# Altium PCB altium.pcbdoc
Units mil, origin at the board's own origin, x right, y up, seen from the top; angles counter-clockwise.
Board outline 9340 x 5450 mil, 2 copper layers (Top Layer, Bottom Layer); 25 components, 42 nets, 121 pads, 14 vias.
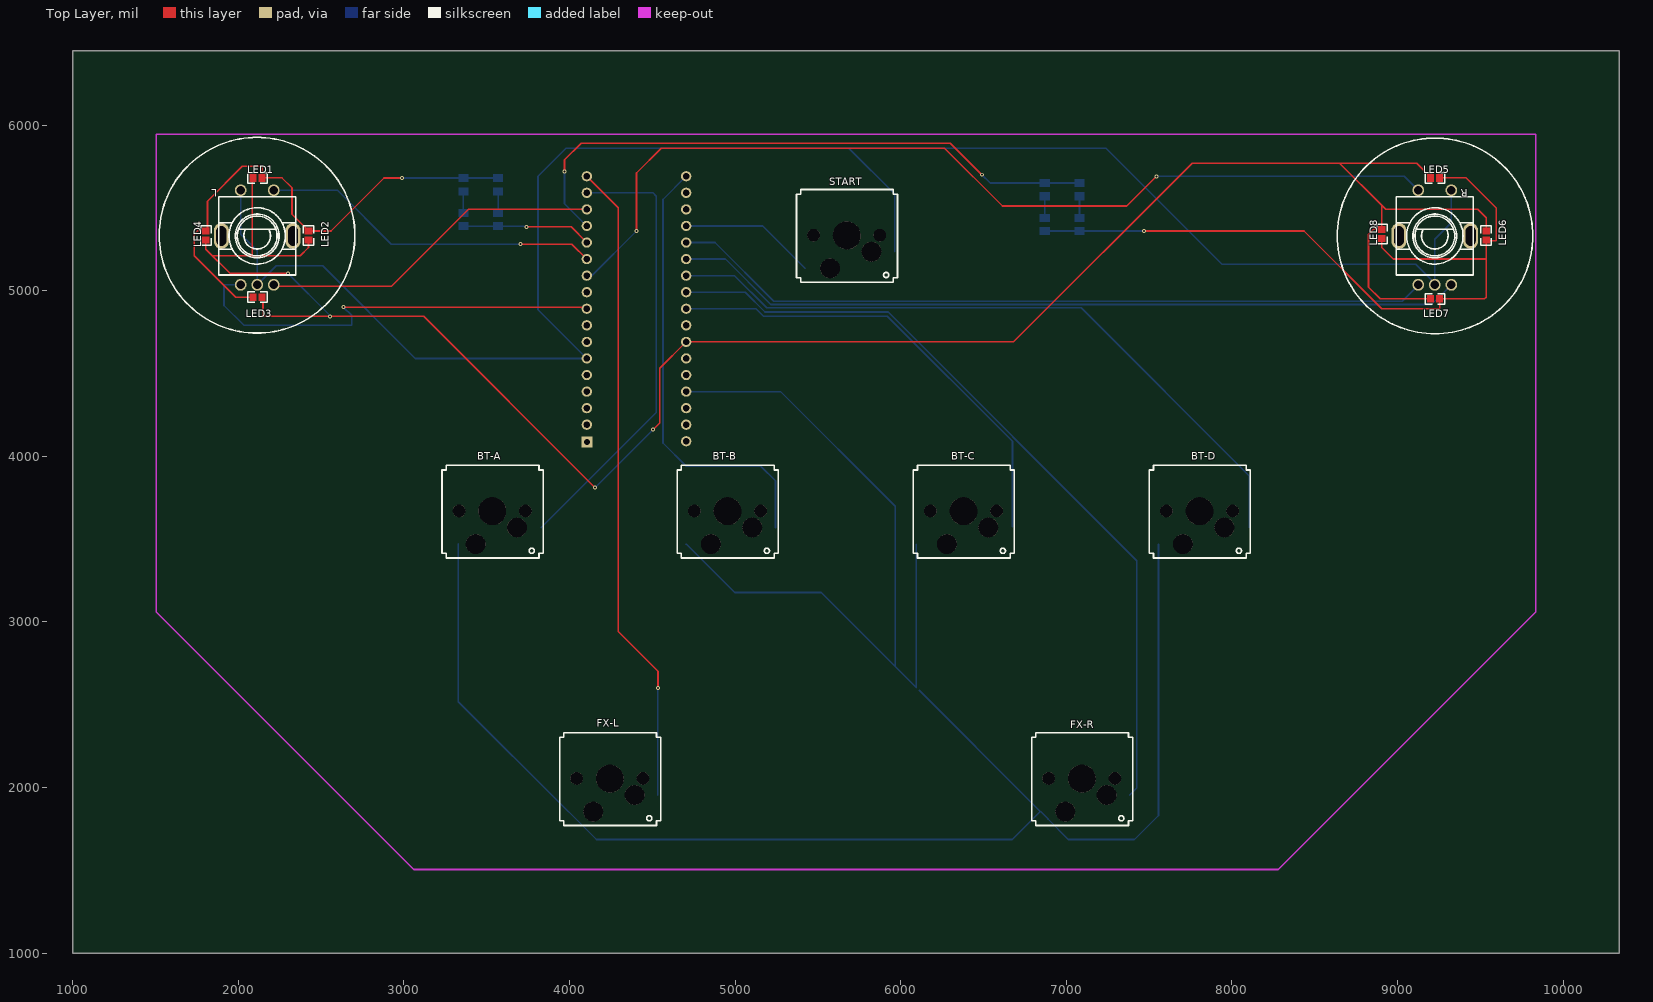
[diagram p0: Top Layer view]
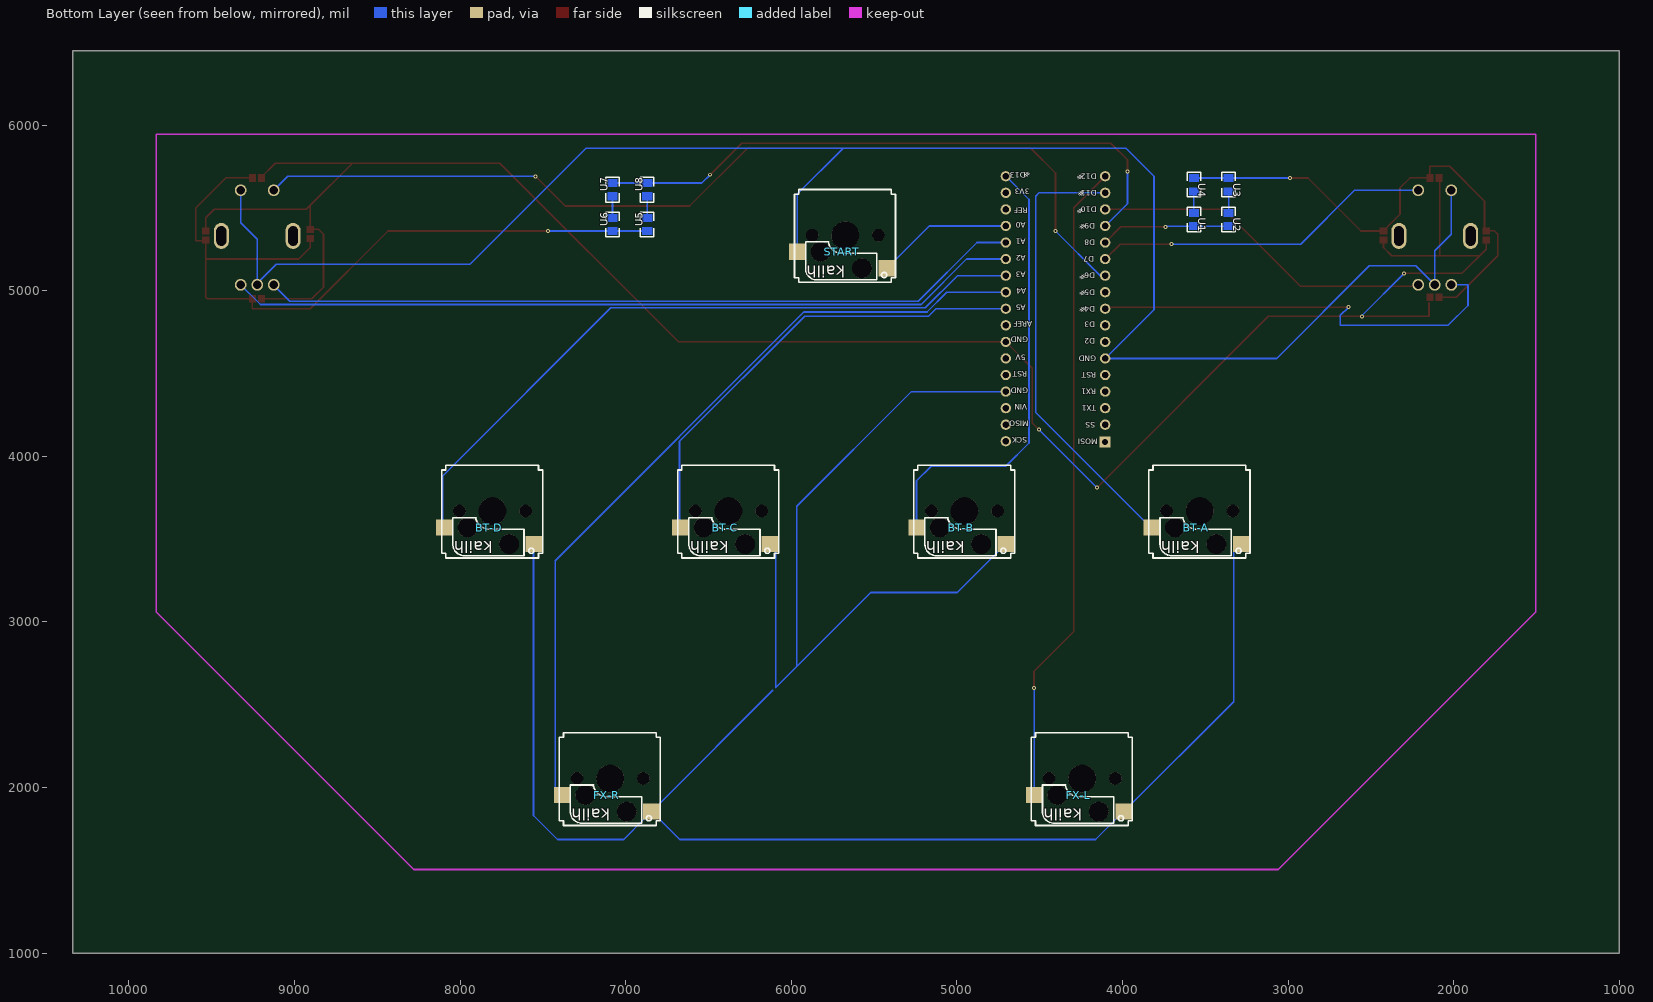
[diagram p1: Bottom Layer view, seen from below]

## Layer stack, top to bottom
Top Layer: signal copper (thickness not stored)
Dielectric: dielectric 12.6, FR-4, Dk 4.8
Bottom Layer: signal copper (thickness not stored)

## Board outline
10340,1000 1000,1000 1000,6450 10340,6450

## Components (designator, comment, footprint, x,y, rotation, side; value= is the part's Value field where it differs from the comment)
BT-A "凯华KAILH热插拔底座" ? 3533.95,3670 r0 top
BT-B "凯华KAILH热插拔底座" ? 4953.95,3670 r0 top
BT-C "凯华KAILH热插拔底座" ? 6378.95,3670 r0 top
BT-D "凯华KAILH热插拔底座" ? 7803.95,3670 r0 top
FX-L "凯华KAILH热插拔底座" ? 4243.95,2055 r0 top
FX-R "凯华KAILH热插拔底座" ? 7093.95,2055 r0 top
L "SW-DIP-11.7X12" SW-DIP-11.7X12 2115,5320.79 r0 top
LED1 "0603" 0603 2085,5680.79 r0 top
LED2 "0603" 0603 2425,5300.79 r90 top
LED3 "0603" 0603 2085,4960.79 r0 top
LED4 "0603" 0603 1805,5300.79 r90 top
LED5 "0603" 0603 9195,5680.79 r0 top
LED6 "0603" 0603 9535,5300.79 r90 top
LED7 "0603" 0603 9195,4950.79 r0 top
LED8 "0603" 0603 8905,5310.79 r90 top
R "SW-DIP-11.7X12" SW-DIP-11.7X12 9225,5320.79 r0 top
START "凯华KAILH热插拔底座" ? 5673.95,5335 r0 top
U1 "0805" 0805 3570,5470 r90 bottom
U2 "0805" 0805 3360,5470 r90 bottom
U3 "0805" 0805 3360,5680 r90 bottom
U4 "0805" 0805 3570,5680 r90 bottom
U5 "0805" 0805 6870,5360 r270 bottom
U6 "0805" 0805 7080,5360 r270 bottom
U7 "0805" 0805 7080,5570 r270 bottom
U8 "0805" 0805 6870,5570 r270 bottom

## Footprints (in the part's own frame and the unit in brackets; to place one, negate y for a bottom-side part, rotate by r counter-clockwise, add the part's x,y. Pads: shape width x height; smd on the part's side, far side on the other; paste and mask are expansions set on the pad)
0603 [mil]
  Top Layer region: 23.63,-21.65 -15.74,-21.65 -15.74,21.65 23.63,21.65
  Top Layer region: 78.75,-21.65 39.38,-21.65 39.38,21.65 78.75,21.65
  silkscreen extent -28,-32 91,32
0805 [mil]
  round 0 smd: 1(-0.01,0.01) 2(-80.01,0.01)
  Top Layer region: -22.85,28.94 -22.85,-28.93 22.82,-28.93 22.82,28.94
  Top Layer region: -102.85,28.94 -102.85,-28.93 -57.18,-28.93 -57.18,28.94
  silkscreen extent -114,-41 35,41
SW-DIP-11.7X12 [mm]
  oval 2.3x4 hole 1.5 slot 3 at 90 deg copper offset 0,0: 6(5.5,0.25) 7(-5.5,0.25)
  round 1.8 hole 1.3: A(-2.54,-7.25) B(2.54,-7.25) C(0,-7.25) D(-2.54,7.25) E(2.54,7.25)
  silkscreen extent -5.9,-5.75 5.9,6.25
? [mil]
  rect 100.4x98.4 smd far side: 1(-250,-200) 2(290,-100)
  round 75 hole 75 slot 75.2 at 0 deg unplated: ""(-200,0) ""(200,0)
  round 118.11 hole 118.11 slot 118.31 at 0 deg unplated: ""(-100,-200) ""(150,-100)
  round 165 hole 165 slot 165.2 at 0 deg unplated: ""(0,0)
  round 161.42 hole 161.42 slot 161.62 at 0 deg unplated: ""(2.22,-4.21)
  silkscreen extent -303,-284 307,276

## Free pads (board coordinates)
  rect 65x65 hole 35.43: 1(4105.83,4086.34)
  round 62 hole 36 slot 36.2 at 90 deg: 2(4105,4190.79) 3(4105,4290.79) 4(4105,4390.79) 5(4105,4490.79) 6(4105,4590.79) 7(4105,4690.79) 8(4105,4790.79) 9(4105,4890.79) 10(4105,4990.79) 11(4105,5090.79) 12(4105,5190.79) 13(4105,5290.79) 14(4105,5390.79) 15(4105,5490.79) 16(4105,5590.79) 17(4105,5690.79) 18(4705,5690.79) 19(4705,5590.79) 20(4705,5490.79) 21(4705,5390.79) 22(4705,5290.79) 23(4705,5190.79) 24(4705,5090.79) 25(4705,4990.79) 26(4705,4890.79) 27(4705,4790.79) 28(4705,4690.79) 29(4705,4590.79) 30(4705,4490.79) 31(4705,4390.79) 32(4705,4290.79) 33(4705,4190.79) 34(4705,4090.79)
  round 165 hole 165 slot 165.2 at 0 deg unplated: ""(5673.95,5335)

## Via types
v1: diameter 24, hole 12, Top Layer to Bottom Layer, 14 vias

## Nets (pads, with @x,y where several pads share a name; then routed paths per layer and width w, separated by ;. In a path a pad name is that pad's centre, name@x,y a point inside that pad or via, vN(x,y) a via of type N, cw(c..) or ccw(c..) an arc to the next point about the centre after c; other vN are vias at no path point)
0L1: U2.1 U3.2 | length 130
  Bottom Layer w10: U2.1 U3.2
0L2: U1.1 U4.2 | length 130
  Bottom Layer w10: U1.1 U4.2
0R1: U6.2 U7.1 | length 130
  Bottom Layer w10: U6.2 U7.1
0R2: U5.2 U8.1 | length 130
  Bottom Layer w10: U5.2 U8.1
3V3: pad.19
+5V: pad.29
A0: pad.21 START.1 | length 825.7
  Bottom Layer w10: pad.21@4704.17,5390.79 5167.16,5390.79 5422.95,5135 START.1
A1: pad.22 R.A | length 4617
  Bottom Layer w10: pad.22@4704.17,5290.79 4879.54,5290.79 5233.95,4936.38 9028.28,4936.38 R.A@9131.6,5039.7
A2: pad.23 R.B | length 4789
  Bottom Layer w10: pad.23@4704.17,5190.79 4941.97,5190.79 5216.38,4916.38 9205.08,4916.38 R.B@9328.4,5039.7
A3: BT-D.2 pad.24 | length 4212.8
  Bottom Layer w10: pad.24@4704.17,5090.79 4996.97,5090.79 5191.38,4896.38 7089.41,4896.38 8105,3880.79 BT-D.2@8105,3570
A4: FX-R.2 pad.25 | length 4825.8
  Bottom Layer w10: pad.25@4704.17,4990.79 5061.97,4990.79 5181.38,4871.38 5924.41,4871.38 7426.38,3369.41 7426.38,1997.43 FX-R.2
A5: BT-C.2 pad.26 | length 2816.9
  Bottom Layer w10: pad.26@4704.17,4890.79 5126.97,4890.79 5171.38,4846.38 5919.41,4846.38 6675,4090.79 BT-C.2@6675,3576.05
AREF: pad.20
D0/RX: pad.4
D1/TX: pad.3
D2/SDA: pad.7
D3/SCL: pad.8
D4*: L.A pad.9 | length 2639.7
  Top Layer w10: v1(2635,4900.79) pad.9@4099.72,4900.79
  Bottom Layer w10: L.A 1915,5035.35 1915,4910.79 2035,4790.79 2685,4790.79 2685,4850.79 v1(2635,4900.79)
D5*: pad.10
D6*: pad.11 R.D | length 5799.4
  Top Layer w10: v1(4405,5360.79) 4405,5710.79 4555,5860.79 6265,5860.79 6615,5510.79 7365,5510.79 v1(7545,5690.79)
  Bottom Layer w10: pad.11@4104.17,5090.79 4135,5090.79 v1(4405,5360.79) ; v1(7545,5690.79) 9040.43,5690.79 R.D
D7: L.E pad.12 | length 2062.1
  Top Layer w10: v1(3705,5280.79) 4015,5280.79 pad.12
  Bottom Layer w10: L.E 2599.57,5606.23 2925,5280.79 v1(3705,5280.79)
GND: BT-A.1 BT-B.1 BT-C.1 BT-D.1 FX-L.1 FX-R.1 L.C L.D pad.6 pad.28 pad.31 R.C R.E START.2 | length 37553.1
  Top Layer w10: 1805,5300.79 1805,5250.79 1950.79,5105 v1(2300,5105) ; 1845,5210.79 2085,5210.79 ; 2085,5680.79 2085,5210.79 ; 2150,4925.79 2150,4845 v1(2555,4845) 3120.79,4845 v1(4155,3810.79) ; 2425,5300.79 2425,5260.79 2375,5210.79 2085,5210.79 ; v1(4505,4160.79) 4545,4200.79 4545,4530.79 pad.28@4704.17,4689.96 ; pad.28@4709.41,4690.79 6680.79,4690.79 7760,5770 8650,5770 ; 8905,5370 8905,5515 ; 8905,5370.79 8855,5370.79 8825,5340.79 8825,5020.79 8895,4950.79 9195,4950.79 ; 9205,5680.79 9115.79,5770 8650,5770 ; 9535,5360.79 9535,5440.79 9485,5490.79 8929.21,5490.79 8905,5515 ; 8650,5770 8905,5515
  Bottom Layer w10: L.D 2014.99,5340.79 2115,5240.79 L.C ; L.C@2115,5035.49 2229.51,5150 2510,5150 3069.21,4590.79 pad.6 3810,4885.79 3810,5690 3980,5860 7240,5860 7940,5160 9109.7,5160 R.C@9230,5039.7 ; v1(2300,5105) 2555,4850 v1(2555,4845) ; BT-A.1@3329.15,3471.29 3329.15,2518.8 3992.95,1855 FX-L.1 ; FX-L.1@3994.95,1855 4163.57,1686.38 6674.33,1686.38 FX-R.1@6842.95,1855 ; v1(4155,3810.79) v1(4505,4160.79) ; BT-B.1 4704.95,3470 4997.38,3177.57 5521.38,3177.57 6095,2603.95 BT-C.1@6095,3470 ; pad.31@4704.17,4390.79 5274.54,4390.79 5967.66,3697.66 5967.66,2731.28 ; 5687.46,5860 5963.95,5583.51 START.2 ; 6111.38,2587.57 6798.75,1900.2 6798.75,1899.2 FX-R.1@6842.95,1855 ; BT-D.1@7556.38,3467.57 7556.38,1831.38 7411.38,1686.38 7012.57,1686.38 6889.15,1809.8 6889.15,1810.8 6844.95,1855 FX-R.1@6842.95,1855 ; R.C 9225,5310.79 9325,5410.79 R.E
IO8: pad.13 U1.2 U2.2 | length 786.1
  Top Layer w10: v1(3740,5385.24) 4010.55,5385.24 pad.13
  Bottom Layer w10: U2.2 U1.2 3735.25,5389.99 v1(3740,5385.24)
IO9*: pad.14 U7.2 U8.2 | length 3706.6
  Top Layer w10: v1(3970,5720) 3970,5790 4070.79,5890.79 6299.21,5890.79 v1(6490,5700)
  Bottom Layer w10: v1(3970,5720) 3970,5525.79 pad.14 ; v1(6490,5700) 6539.99,5650.01 U8.2 U7.2
IO10*: L.B pad.15 | length 2086.9
  Top Layer w10: L.B@2213.4,5035.49 2222.51,5026.38 2926.38,5026.38 3390.79,5490.79 pad.15@4104.17,5490.79
IO11*: BT-A.2 pad.16 | length 2717.8
  Bottom Layer w10: BT-A.2@3830,3570 4525,4265 4525,5570.79 4505,5590.79 pad.16@4104.17,5590.79
IO12*: FX-L.2 pad.17 | length 3915.5
  Top Layer w10: pad.17@4104.17,5691.62 4295,5500.79 4295,2942.76 4535,2702.76 v1(4535,2600.79)
  Bottom Layer w10: FX-L.2 4533.95,2599.74 v1(4535,2600.79)
IO13*: BT-B.2 pad.18 | length 2722.4
  Bottom Layer w10: pad.18@4704.17,5689.96 4565,5550.79 4565,4080.79 4705,3940.79 5155,3940.79 5243.95,3851.84 BT-B.2
LED-L: U3.1 U4.1 | length 3126.6
  Top Layer w10: 2088.63,4960.79 1985,4960.79 1735,5210.79 1735,5340.79 1755,5360.79 1815,5360.79 1815,5540.79 2025,5750.79 2145,5750.79 2145,5680.79 2265,5680.79 2325,5620.79 2325,5460.79 2425.78,5360.01 2560.95,5360.01 2880.93,5679.99 v1(2990,5679.99)
  Bottom Layer w10: v1(2990,5679.99) U3.1 U4.1
LED-R: U5.1 U6.1 | length 4757.1
  Top Layer w10: v1(7470,5360.01) 8434.99,5360.01 8904.21,4890.79 9255,4890.79 9255,4950.79 9525,4950.79 9535,4960.79 9535,5300.79 ; 8905,5310.79 8905,5260.79 8975,5190.79 9535,5190.79 9535,5300.79 ; 9255,5680.79 9415,5680.79 9595,5500.79 9595,5300.79 9535,5300.79
  Bottom Layer w10: U5.1 U6.1 v1(7470,5360.01)
MISO: pad.33
RESET: pad.5 pad.30
RXLED/SS: pad.2
S$39: 
S$41: 
S$51: 
S$54: 
S$56: 
S$58: 
S$60: 
SCK: pad.34
VIN: pad.32
pads on no net: BT-A. BT-B. BT-C. BT-D. FX-L. FX-R. L.6 L.7 R.6 R.7 START.

## Silkscreen, mask and mechanical layers (free items; w line width, h text height)
Top Overlay:
  lines w10: 2704.5,5334.79 cw(c2113.95,5334.9) 2704.5,5335 ; 9816.72,5330.58 cw(c9226.17,5330.69) 9816.72,5330.79
Bottom Overlay:
  text "D13" at 4585.83,5714.53 h32 r180
  text "D12" at 4155,5706.79 h32 r180
  text "#" at 4551.43,5701.47 h32 r216
  text "#" at 4230.6,5688.73 h32 r216
  text "3V3" at 4560.79,5614.37 h32 r180
  text "D11" at 4155,5606.79 h32 r180
  text "#" at 4225.6,5588.73 h32 r216
  text "D10" at 4155,5506.79 h32 r180
  text "REF" at 4573.31,5501.69 h32 r180
  text "#" at 4230.6,5483.73 h32 r216
  text "A0" at 4585.83,5414.05 h32 r180
  text "D9" at 4165,5406.79 h32 r180
  text "#" at 4215.6,5388.73 h32 r216
  text "A1" at 4585.83,5314.05 h32 r180
  text "D8" at 4165,5306.79 h32 r180
  text "A2" at 4585.83,5214.05 h32 r180
  text "D7" at 4170,5206.79 h32 r180
  text "A3" at 4585.83,5114.05 h32 r180
  text "D6" at 4165,5106.79 h32 r180
  text "#" at 4215.6,5083.73 h32 r216
  text "A4" at 4580.83,5014.05 h32 r180
  text "D5" at 4165,5006.79 h32 r180
  text "#" at 4215.6,4988.73 h32 r216
  text "A5" at 4585.83,4914.05 h32 r180
  text "D4" at 4165,4906.79 h32 r180
  text "#" at 4215.6,4888.73 h32 r216
  text "AREF" at 4545.83,4814.05 h32 r180
  text "D3" at 4165,4811.79 h32 r180
  text "GND" at 4570.83,4721.55 h32 r180
  text "D2" at 4165,4711.79 h32 r180
  text "5V" at 4585.83,4614.05 h32 r180
  text "GND" at 4160,4606.79 h32 r180
  text "RST" at 4575.83,4514.05 h32 r180
  text "RST" at 4160,4506.79 h32 r180
  text "GND" at 4570.83,4414.05 h32 r180
  text "RX1" at 4160,4406.79 h32 r180
  text "VIN" at 4575.83,4314.05 h32 r180
  text "TX1" at 4160,4306.79 h32 r180
  text "MISO" at 4565.83,4214.05 h32 r180
  text "SS" at 4165,4206.79 h32 r180
  text "SCK" at 4575.83,4114.05 h32 r180
  text "MOSI" at 4150,4106.79 h32 r180
Document:
  lines w0.1: 5669,3724 5671,3726

## Text inside footprints (layer, text, board x,y; h text height)
BT-A: Bottom Overlay "kailh" at 3533.95,3486.43 h70.87 r180; Mechanical 3 "1U" at 3293.95,3960 h40 r180
BT-B: Bottom Overlay "kailh" at 4953.95,3486.43 h70.87 r180; Mechanical 3 "1U" at 4713.95,3960 h40 r180
BT-C: Bottom Overlay "kailh" at 6378.95,3486.43 h70.87 r180; Mechanical 3 "1U" at 6138.95,3960 h40 r180
BT-D: Bottom Overlay "kailh" at 7803.95,3486.43 h70.87 r180; Mechanical 3 "1U" at 7563.95,3960 h40 r180
FX-L: Bottom Overlay "kailh" at 4243.95,1871.43 h70.87 r180; Mechanical 3 "1U" at 4003.95,2345 h40 r180
FX-R: Bottom Overlay "kailh" at 7093.95,1871.43 h70.87 r180; Mechanical 3 "1U" at 6853.95,2345 h40 r180
START: Bottom Overlay "kailh" at 5673.95,5151.43 h70.87 r180; Mechanical 3 "1U" at 5433.95,5625 h40 r180